# Altium PCB TB-01_V1.0.PcbDoc
Units mm, origin at the board's own origin, x right, y up, seen from the top; angles counter-clockwise.
Board outline 26.04 x 42.47 mm, 2 copper layers (Top Layer, Bottom Layer), stack 0.971 mm thick; 36 components, 38 nets, 148 pads, 86 vias.
Unrouted connection lines stored in the file: 1.
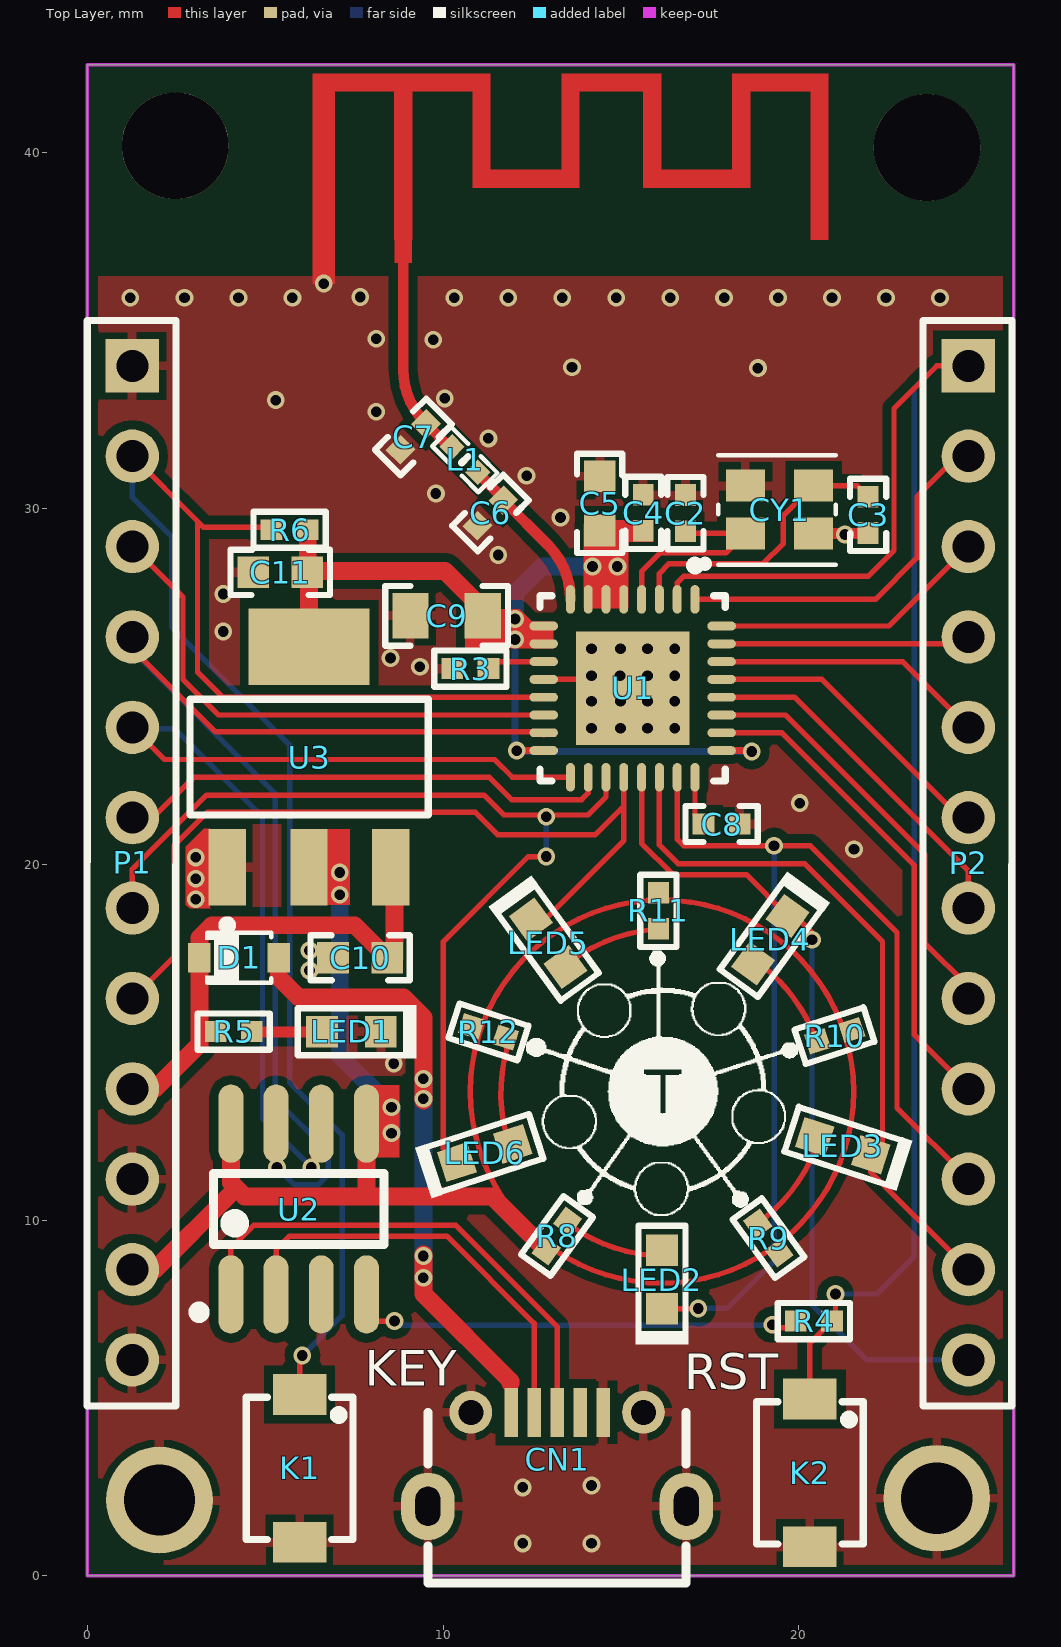
[diagram p0: Top Layer view]
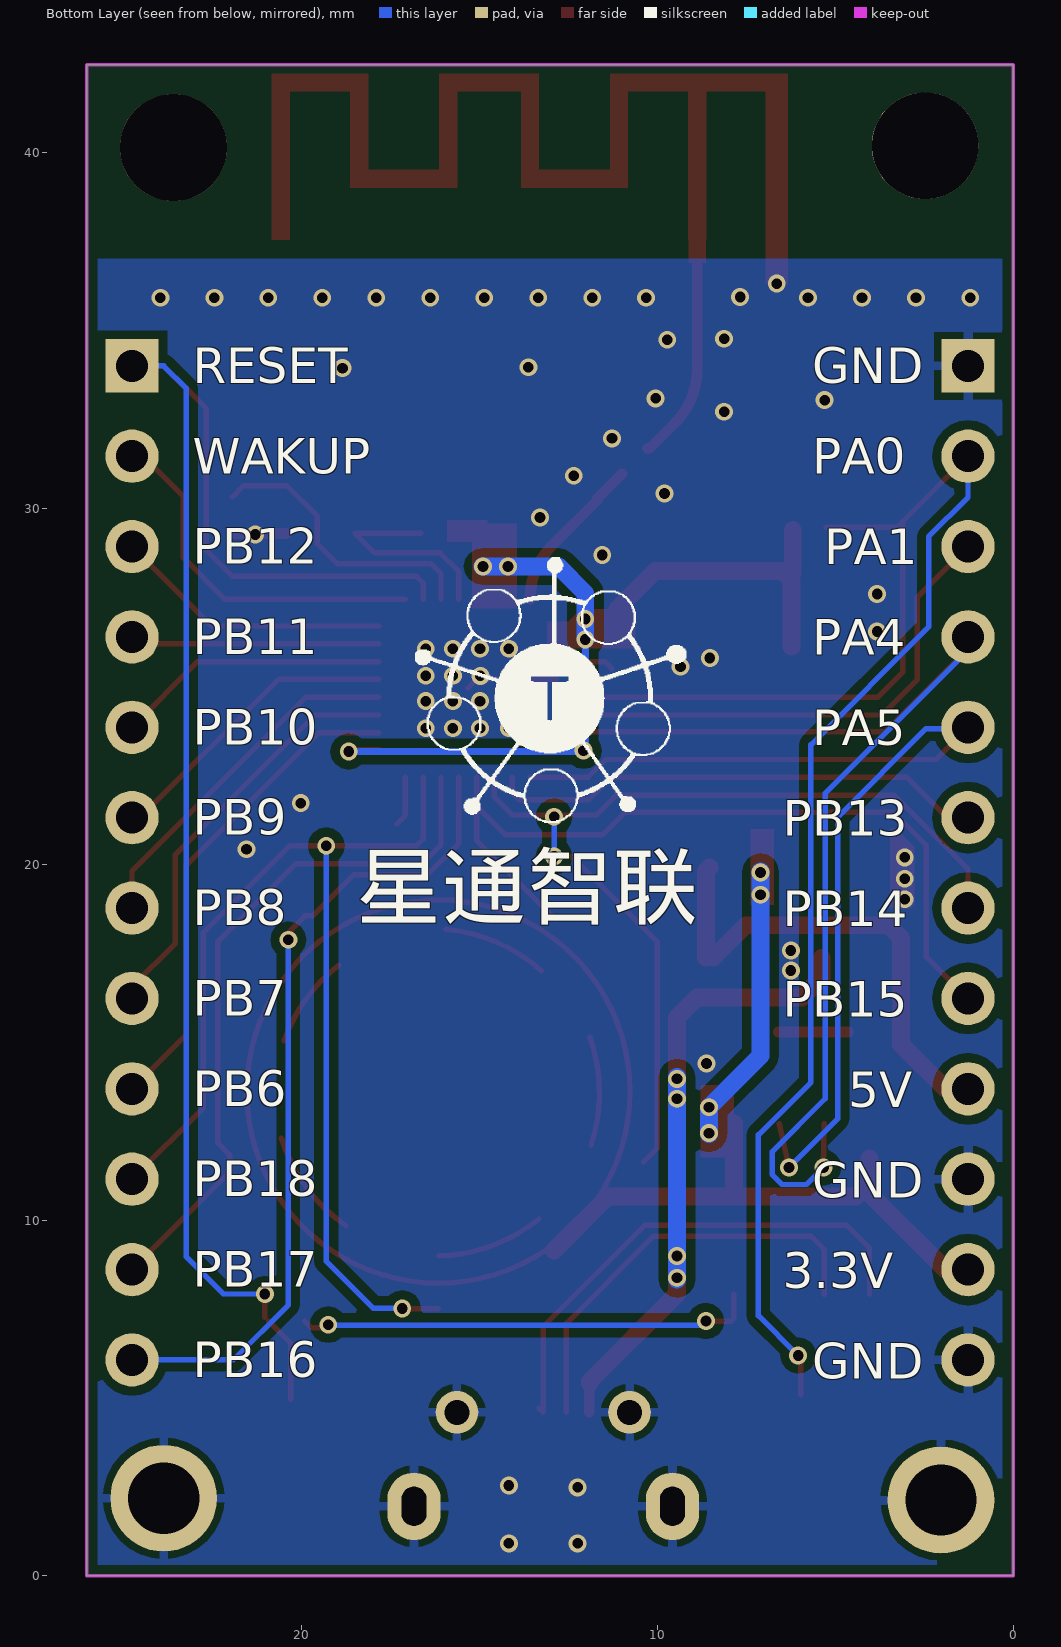
[diagram p1: Bottom Layer view, seen from below]
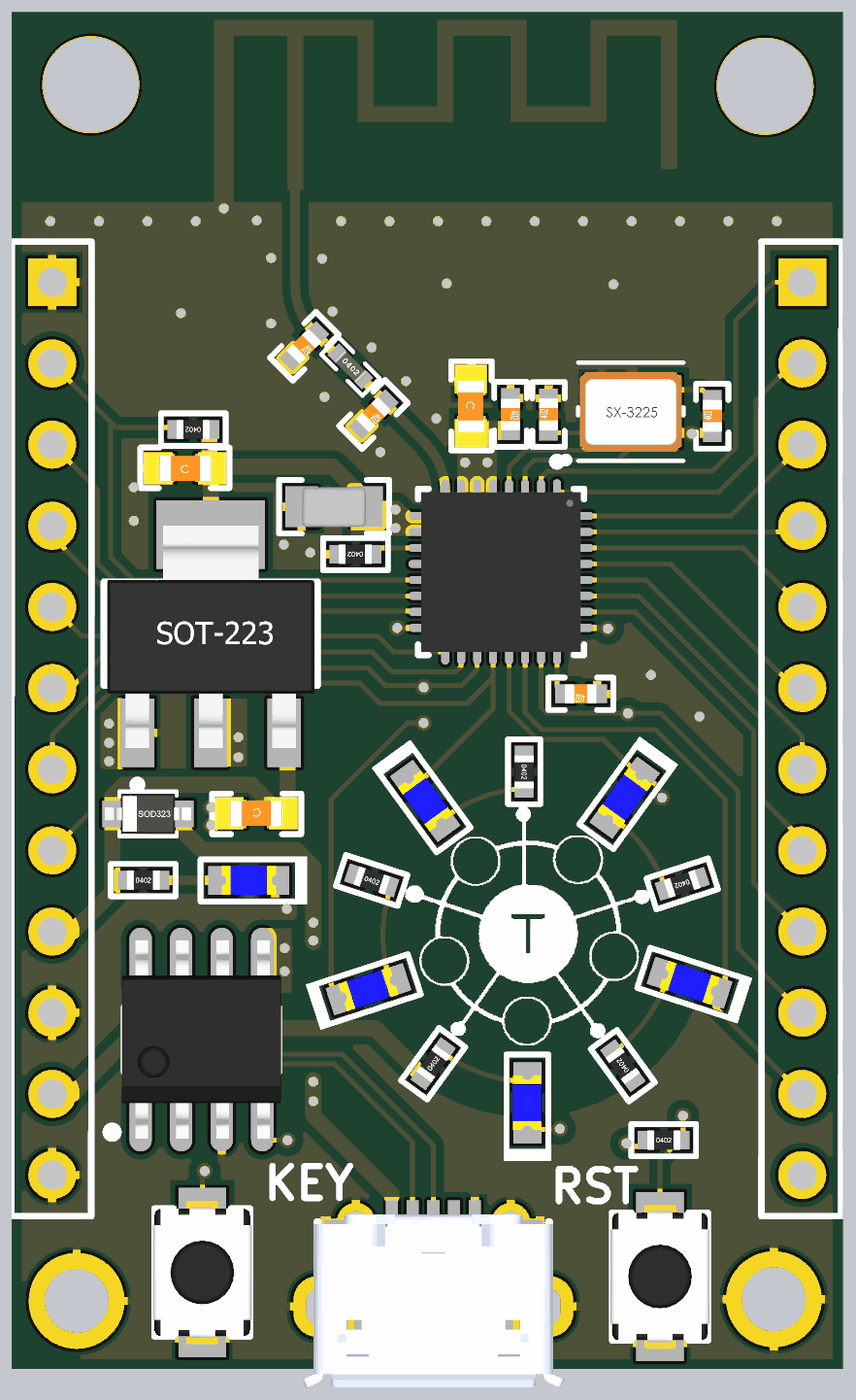
[diagram p2: 3D render of the assembled board from above, using the file's embedded part models]

## Layer stack, top to bottom
Top Solder: solder mask 0.0102, Solder Resist, Dk 3.5
Top Layer: signal copper 0.0356
Dielectric 1: dielectric 0.9, FR-4, Dk 4.8
Bottom Layer: signal copper 0.0356
Bottom Solder: solder mask 0.0102, Solder Resist, Dk 3.5

## Board outline
0,0 0,42.469 26.035,42.469 26.035,0

## Design rules (kind name [scope] priority, off if disabled: settings)
Clearance Clearance_1 [InPolygon] p1: gap=0.254 ignorepadtopadclearanceinfootprint=FALSE except(0: Arc-Hole Track-Hole SMDPad-Hole THPad-Hole Via-Hole Fill-Hole Poly-Hole Region-Hole Text-Hole)
Clearance [All] p2: gap=0.152 ignorepadtopadclearanceinfootprint=FALSE except(0: Arc-Hole Track-Hole SMDPad-Hole THPad-Hole Via-Hole Fill-Hole Poly-Hole Region-Hole Text-Hole)
HoleToHoleClearance [All] p1: gap=0 allowstackedmicrovias=TRUE
MinimumSolderMaskSliver [All] p1: minsoldermaskwidth=0
PolygonConnect PolygonConnect_2 [All vs InComponent('C6') Or InComponent('C7')] p1: connectstyle=Direct reliefconductorwidth=0.254 reliefentries=4 polygonreliefangle="90 Angle" airgapwidth=0.254
PolygonConnect PolygonConnect_1 [All vs InPadClass('ALL PADS')] p2: connectstyle=Relief reliefconductorwidth=0.254 reliefentries=4 polygonreliefangle="90 Angle" airgapwidth=0.2
PolygonConnect [All] p3: connectstyle=Direct reliefconductorwidth=0.254 reliefentries=4 polygonreliefangle="90 Angle" airgapwidth=0.2
RoutingVias [All] p1: holewidth=0.3 width=0.5 viastyle="Through Hole" minholewidth=0.2 minwidth=0.4 maxholewidth=0.5 maxwidth=1
SilkToSilkClearance [All] p1: silktosilkclearance=0
SilkToSolderMaskClearance [IsPad] p1: minsilkscreentomaskgap=0 clearancetoexposedcopper=TRUE
SolderMaskExpansion [All] p1: expansion=0.102
Width [All] p1: maxlimit=1.27 minlimit=0.152 preferedwidth=0.152
26 further rules are at their usual default settings.

## Components (designator, comment, footprint, x,y, rotation, side; value= is the part's Value field where it differs from the comment)
C2 "15PF" 0402C 16.815,30.378 r0 top
C3 "15PF" 0402C 21.946,30.328 r0 top
C4 "0.1uF" 0402C 15.625,29.371 r180 top
C5 "4.7uF" 0603C 14.4,30.146 r90 top
C6 "NC" 0402C 10.973,29.515 r135 top
C7 "NC" 0402C 8.807,31.652 r135 top
C8 "1uF" 0402C 17.323,21.133 r90 top
C9 "47uF" 0805C 10.1,26.985 r180 top
C10 "10uF" 0603C 7.671,17.374 r0 top
C11 "10uF" 0603C 5.425,28.204 r180 top
CN1 "USB_Type-MICRO" MICRO_USB_DIPB 13.208,3.277 r270 top
CY1 "40MHz" CY3225 19.456,29.972 r0 top
D1 "IN4148" 1n5819 4.267,17.374 r180 top
K1 "Button" BUTTON3*4*2 5.969,3.023 r270 top
K2 "Button" BUTTON3*4*2 20.309,2.896 r270 top
L1 "6.8PF" 0402L 10.613,31.375 r315 top
LED1 "Red" 0603LED 7.425,15.291 r270 top
LED2 "Red" 0603LED 16.154,8.331 r180 top
LED3 "Red" 0603LED 21.234,12.09 r252 top
LED4 "Red" 0603LED 19.202,17.882 r324 top
LED5 "Red" 0603LED 12.954,17.78 r36 top
LED6 "Red" 0603LED 11.176,11.887 r108 top
P1 "1*12pin 2.54" "1*12PIN 2.54" 1.27,20.041 r270 top
P2 "1*12pin 2.54" "1*12PIN 2.54" 24.765,20.041 r270 top
R3 "24K" 0402R#1 10.262,25.502 r90 top
R4 "0R" 0402R#1 20.93,7.163 r270 top
R5 "4.7K" 0402R#1 4.625,15.3 r270 top
R6 "10K" 0402R#1 5.182,29.402 r90 top
R8 "1K" 0402R#1 13.5,9.966 r324 top
R9 "1K" 0402R#1 18.847,9.906 r36 top
R10 "1K" 0402R#1 20.522,15.028 r108 top
R11 "1K" 0402R#2 16.053,18.694 r180 top
R12 "1K" 0402R#2 11.278,15.291 r252 top
U1 "W600" W600 15.331,24.947 r270 top
U2 "CH330N" CH330N 5.944,10.312 r0 top
U3 "AMS1117" AMS1117 6.234,23.014 r270 top

## Footprints (in the part's own frame and the unit in brackets; to place one, negate y for a bottom-side part, rotate by r counter-clockwise, add the part's x,y. Pads: shape width x height; smd on the part's side, far side on the other; paste and mask are expansions set on the pad)
"1*12PIN 2.54" [mm]
  rect 1.5x1.5 hole 0.9: 1(-13.97,0)
  round 1.5 hole 0.9: 2(-11.43,0) 3(-8.89,0) 4(-6.35,0) 5(-3.81,0) 6(-1.27,0) 7(1.27,0) 8(3.81,0) 9(6.35,0) 10(8.89,0) 11(11.43,0) 12(13.97,0)
  silkscreen extent -15.24,-1.28 15.26,1.23, body extent -15.18,-1.23 15.3,1.31, height 2.38
1n5819 [mm]
  rect 0.63x0.83 smd: 1(-1.115,0) 2(1.115,0)
  silkscreen extent -0.9,-0.7 0.96,0.7, body extent -1.35,-0.62 1.35,0.62, height 1.1
0402C [mil]
  rect 23x24 smd: 1(0,0) 2(0,-40)
  silkscreen extent -20,-60 20,20, body extent -12,-39 12,0, height 8
0402L [mil]
  rect 20x20 smd: 1(-20,0) 2(20,0)
  silkscreen extent -36,-15 36,15, body extent -20,-10 20,10, height 20
0402R#1 [mil]
  rect 23x24 smd: 1(0,0) 2(0,-40)
  silkscreen extent -20,-60 20,20, body extent -12,-40 12,1, height 13
0402R#2 [mil]
  rect 23x24 smd: 1(0,20) 2(0,-20)
  silkscreen extent -20,-40 20,40, body extent -12,-20 12,21, height 13
0603C [mil]
  rect 35x35 smd: 1(-30,0) 2(30,0)
  silkscreen extent -55,-25 55,25, body extent -52,-19 51,20, height 35
0603LED [mil]
  rect 35x35 smd: 1(0,-32.5) 2(0,32.5)
  silkscreen extent -29,-60 29,72, body extent -18,-33 18,33, height 35
0805C [mil]
  rect 40x50 smd: 1(40,0) 2(-40,0)
  silkscreen extent -68,-33 68,33, body extent -39,-24 39,25, height 31
AMS1117 [mm]
  rect 2.15x1.05 smd: 1(3.1,2.3) 2(3.1,0) 3(3.1,-2.3)
  rect 2.15x3.4 smd: 2(-3.1,0)
  silkscreen extent -1.62,-3.35 4.85,3.35, body extent -3.38,-3.25 3.58,3.25, height 1.7
BUTTON3*4*2 [mm]
  rect 1.143x1.5 smd: 1(-2.075,0) 2(2.075,0)
  round 0 all layers, no hole paste-2.54 mask-2.54: MH1(0,0.9) MH2(0,-0.9)
  silkscreen extent -2,-1.5 2,1.5, body extent -2.25,-1.55 2.25,1.55, height 2.05
CH330N [mm]
  oval 0.7x2.2 smd: 1(-1.905,-2.4) 2(-0.635,-2.4) 3(0.635,-2.4) 4(1.905,-2.4) 5(1.905,2.4) 6(0.635,2.4) 7(-0.635,2.4) 8(-1.905,2.4)
  silkscreen extent -2.95,-3.05 2.4,1, body extent -2.5,-3.1 2.5,3.1, height 1.75
CY3225 [mm]
  rect 1.1x0.899 smd: 1(-0.96,-0.673) 2(0.96,-0.673) 3(0.96,0.673) 4(-0.96,0.673)
  silkscreen extent -2.2,-1.62 1.59,1.52, body extent -1.66,-1.27 1.54,1.23, height 0.81
MICRO_USB_DIPB [mil]
  rect 54x15 smd: 1(-52,-51) 2(-52,-25.5) 3(-52,0) 4(-52,25.5) 5(-52,51)
  oval 74.8x59.06 hole 27.56 slot 43.31 at 0 deg: 6(52,143) 7(52,-143)
  round 47.24 hole 27.5: 8(-52,-95.5) 9(-52,95.5)
  silkscreen extent -52,-143 137,143, body extent -61,-161 152,161, height 105
W600 [mm]
  oval 0.8x0.25 smd: 1(-2.5,1.75) 2(-2.5,1.25) 3(-2.5,0.75) 4(-2.5,0.25) 5(-2.5,-0.25) 6(-2.5,-0.75) 7(-2.5,-1.25) 8(-2.5,-1.75) 17(2.5,-1.75) 18(2.5,-1.25) 19(2.5,-0.75) 20(2.5,-0.25) 21(2.5,0.25) 22(2.5,0.75) 23(2.5,1.25) 24(2.5,1.75)
  oval 0.25x0.8 smd: 9(-1.75,-2.5) 10(-1.25,-2.5) 11(-0.75,-2.5) 12(-0.25,-2.5) 13(0.25,-2.5) 14(0.75,-2.5) 15(1.25,-2.5) 16(1.75,-2.5) 25(1.75,2.5) 26(1.25,2.5) 27(0.75,2.5) 28(0.25,2.5) 29(-0.25,2.5) 30(-0.75,2.5) 31(-1.25,2.5) 32(-1.75,2.5)
  rect 3.2x3.2 smd paste-2.54: 33(0,0)
  silkscreen extent -3.57,-2.6 2.6,2.6, body extent -2.51,-2.51 2.51,2.51, height 0.8

## Part data
C2 C3 C4 C5 C6 C7 C8 C9 C10 C11: library part CAP
CY1: library part CY3225
L1: library part L
LED1 LED2 LED3 LED4 LED5 LED6: library part LED
R3 R4 R5 R6 R8 R9 R10 R11 R12: library part RES

## Free pads (board coordinates)
  round 3 hole 2: 2(2.032,2.134) 2(23.876,2.184)
  round 3 hole 3: 2(2.475,40.196) 2(23.6,40.146)

## Via types
v1: diameter 0.5, hole 0.3, Top Layer to Bottom Layer, tented both sides, 86 vias

## Nets (pads, with @x,y where several pads share a name; then routed paths per layer and width w, separated by ;. In a path a pad name is that pad's centre, name@x,y a point inside that pad or via, vN(x,y) a via of type N, cw(c..) or ccw(c..) an arc to the next point about the centre after c; other vN are vias at no path point)
5V: C10.2 D1.2 P1.9 R5.2 U3.1 | length 13.8
  Top Layer w0.5: P1.9 1.905,13.691 3.152,14.938 D1.2 3.152,17.935 3.505,18.288 7.518,18.288 C10.2 ; U3.1 8.636,19.812 C10.2@8.636,17.374
ANT: C6.2 L1.2 U1.8 | length 4.5
  Top Layer w0.305: L1.2@10.993,30.977 11.691,30.279 C6.2 12.947,28.978 cw(c11.416,27.447) U1.8
ANT1: C7.2 L1.1 | length 6
  Top Layer w0.305: 8.882,37.196 8.882,33.901 ccw(c10.991,33.901) 9.5,32.41 10.214,31.696 L1.1@10.275,31.696
GND: C2.1 C3.2 C4.2 C5.2 C6.1 C7.1 C8.2 C9.1 C10.1 C11.2 CN1.5 CN1.6 CN1.7 CN1.8 CN1.9 CY1.2 CY1.4 K1.2 K2.2 LED1.2 P1.1 P1.10 P1.12 pad.2@2.032,2.134 pad.2@23.876,2.184 R3.1 U1.12 U1.33 U2.3 U3.3 | length 4.1
  Top Layer w0.152: U1.12 15.081,25.197 U1.33
  Top Layer w0.305: CY1.2 C3.2@21.933,29.299
  other v1: 12.243,0.914 14.173,0.914 12.243,2.489 14.173,2.54 8.618,14.4 6.248,17.018 6.248,17.577 3.05,19.021 3.05,19.596 3.05,20.196 21.55,20.421 20.025,21.721 14.173,23.825 14.986,23.825 15.748,23.825 16.51,23.825 14.173,24.587 14.986,24.587 15.748,24.587 16.51,24.587 14.175,25.296 14.975,25.296 15.748,25.298 16.51,25.298 9.35,25.55 8.525,25.8 14.173,26.06 14.986,26.06 15.748,26.06 16.51,26.06 3.825,26.546 3.825,27.596 11.55,28.696 21.3,29.271 13.3,29.746 9.8,30.421 12.35,30.921 11.275,31.971 8.125,32.721 5.3,33.046 10.05,33.096 18.85,33.946 13.625,33.971 9.725,34.746 8.125,34.771 1.209,35.921 2.733,35.921 4.25,35.921 5.767,35.921 10.317,35.921 11.834,35.921 13.35,35.921 14.867,35.921 16.384,35.921 17.901,35.921 19.417,35.921 20.934,35.921 22.451,35.921 23.968,35.921 7.675,35.946 6.645,36.321
NetC8_1: C8.1 U1.24 | length 1.4
  Top Layer w0.152: U1.24 17.081,21.375 C8.1
NetCN1_2: CN1.2 U2.2 | length 12.2
  Top Layer w0.152: U2.2 5.309,9.169 5.69,9.55 10.109,9.55 12.56,7.099 CN1.2
NetCN1_3: CN1.3 U2.1 | length 14.5
  Top Layer w0.152: U2.1 4.039,9.22 4.674,9.855 10.363,9.855 13.208,7.01 CN1.3 CN1.3@13.322,4.712
NetLED1_1: LED1.1 R5.1 | length 2
  Top Layer w0.305: R5.1@4.625,15.291 LED1.1
NetLED2_1: LED2.1 R8.1 | length 3
  Top Layer w0.152: R8.1@13.334,10.029 ccw(c16.25,13.621) LED2.1@16.145,8.995
NetLED3_1: LED3.1 R9.1 | length 3.1
  Top Layer w0.152: R9.1@18.752,9.845 ccw(c16.15,13.671) LED3.1@20.571,12.308
NetLED4_1: LED4.1 R10.1 | length 2.7
  Top Layer w0.152: LED4.1@18.955,17.162 cw(c16.13,13.499) R10.1@20.492,15.04
NetLED5_1: LED5.1 R11.1 | length 3
  Top Layer w0.152: LED5.1@13.263,17.009 cw(c16.35,13.564) R11.1@15.952,18.173
NetLED6_1: LED6.1 R12.1 | length 3.1
  Top Layer w0.152: LED6.1@11.866,12.106 cw(c16.252,13.577) R12.1@11.9,15.146
NetR3_2: R3.2 U1.11 | length 1.6
  Top Layer w0.152: R3.2 11.473,25.697 U1.11
PA0: K1.1 P1.2 R6.1 U1.13 | length 48.3
  Top Layer w0.152: P1.2 3.099,29.642 ; R6.1@5.25,29.471 3.27,29.471 3.099,29.642 ; K1.1 v1@5.969,6.121 ; U1.13 3.802,24.697 3.099,25.4 3.099,29.642
  Bottom Layer w0.152: P1.2 1.27,30.315 2.375,29.21 2.375,26.67 5.69,23.355 5.69,13.868 7.163,12.395 7.163,7.315 v1(6.045,6.198)
PA1: P1.3 U1.14 | length 14.9
  Top Layer w0.152: P1.3 2.692,27.508 2.692,25.197 3.692,24.197 U1.14
PA4: P1.4 U1.15 U2.7 | length 33.2
  Top Layer w0.152: P1.4@1.105,26.226 3.61,23.721 12.756,23.721 U1.15@12.831,23.646 ; U2.7 v1(5.334,11.481)
  Bottom Layer w0.152: P1.4 1.27,26.01 5.283,21.996 5.283,13.411 6.778,11.917 6.778,11.283 6.497,11.002 5.813,11.002 v1(5.334,11.481)
PA5: P1.5 U1.17 U2.6 | length 29.3
  Top Layer w0.152: P1.5 2.175,22.946 11.45,22.946 11.949,22.447 U1.17 ; v1(6.299,11.481) U2.6
  Bottom Layer w0.152: P1.5@1.232,23.812 2.451,23.812 4.928,21.336 4.928,12.852 v1(6.299,11.481)
PB6: P2.9 U1.26 | length 14
  Top Layer w0.152: U1.26 19.524,23.697 23.241,19.98 23.241,15.215 P2.9 P2.9@24.765,13.818
PB7: P2.8 U1.27 | length 11.9
  Top Layer w0.152: U1.27 19.624,24.197 23.546,20.275 23.546,17.781 24.765,16.562 P2.8
PB8: P2.7 U1.28 | length 10
  Top Layer w0.152: U1.28 19.874,24.697 24.765,19.806 P2.7
PB9: P2.6 U1.29 | length 8.5
  Top Layer w0.152: U1.29 20.649,25.197 24.535,21.311 P2.6
PB10: P2.5 U1.30 | length 7.7
  Top Layer w0.152: U1.30 22.919,25.697 P2.5
PB11: P2.4 U1.31 | length 7
  Top Layer w0.152: U1.31 24.571,26.197 P2.4
PB12: P2.3 U1.32 | length 7.9
  Top Layer w0.152: U1.32 22.531,26.697 P2.3
PB13: P1.6 U1.18 | length 14.1
  Top Layer w0.152: P1.6 1.854,21.311 2.989,22.446 11.3,22.446 11.927,21.818 13.893,21.818 14.081,22.006 U1.18
PB14: LED6.2 P1.7 U1.19 | length 28.1
  Top Layer w0.152: P1.7 1.27,19.863 3.353,21.946 11.15,21.946 11.709,21.387 14.072,21.387 14.581,21.896 U1.19 ; LED6.2@10.058,11.965 LED6.2 10.008,12.015 10.008,17.831 12.395,20.218 v1(12.903,20.218)
  Bottom Layer w0.152: v1(12.903,20.218) v1(12.903,21.336)
PB15: LED5.2 P1.8 U1.20 | length 23.3
  Top Layer w0.152: P1.8 2.438,17.399 2.438,20.523 3.384,21.469 10.902,21.469 11.543,20.828 14.268,20.828 15.081,21.641 ; LED5.2@12.86,18.448 15.081,20.669 15.081,21.641 ; U1.20 15.081,21.641
PB16: LED4.2 P2.12 U1.21 | length 23.2
  Top Layer w0.152: U1.21 15.581,20.589 16.434,19.736 16.46,19.736 16.485,19.71 18.527,19.71 LED4.2 19.906,18.549 20.371,18.085 v1(20.371,17.882)
  Bottom Layer w0.152: v1(20.371,17.882) 20.371,7.62 21.92,6.071 P2.12
PB17: LED3.2 P2.11 U1.22 | length 20.2
  Top Layer w0.152: U1.22 16.081,20.546 16.612,20.015 20.168,20.015 22.352,17.831 22.352,12.168 LED3.2 22.019,11.356 P2.11 P2.11@24.765,9.068
PB18: LED2.2 P2.10 U1.23 | length 32.1
  Top Layer w0.152: LED2.2 v1@17.158,7.506 ; U1.23 16.581,20.706 16.764,20.523 v1(19.304,20.523) 20.32,20.523 22.758,18.085 22.758,13.157 P2.10
  Bottom Layer w0.152: v1(17.17,7.518) 17.983,7.518 19.304,8.839 v1(19.304,20.523)
RESET: K2.1 P2.1 R4.1 U1.2 | length 45.5
  Top Layer w0.152: U1.2 16.581,27.909 16.764,28.092 21.946,28.092 22.675,28.822 22.675,32.81 23.876,34.011 P2.1 ; K2.1 20.309,6.542 R4.1 ; R4.1@21.031,7.264 v1(21.031,7.925)
  Bottom Layer w0.152: v1@20.98,7.925 v1(21.031,7.925) 22.2,7.925 23.241,8.966 23.241,33.376 23.876,34.011 P2.1
RTS: R4.2 U2.4 | length 12.9
  Top Layer w0.152: U2.4 7.849,7.239 7.925,7.163 v1(8.636,7.163) ; v1(19.253,7.061) 19.344,6.971 19.721,6.971 R4.2
  Bottom Layer w0.152: v1(8.636,7.163) 8.759,7.04 v1@19.253,7.04
V5V: CN1.1 D1.1 | length 18.6
  Top Layer w0.3: 11.9,5.414 11.913,5.402 CN1.1
  Top Layer w0.5: D1.1 5.382,16.817 5.944,16.256 8.89,16.256 9.449,15.697 v1(9.449,13.97) v1(9.449,13.411) v1@9.449,13.36 ; v1@9.449,9.042 v1(9.449,8.992) v1(9.449,8.382) 9.449,7.925 11.9,5.474 11.9,5.414
  Bottom Layer w0.5: v1@9.449,8.331 v1(9.449,8.382) v1(9.449,8.992) v1(9.449,13.411) v1(9.449,13.97) v1@9.449,14.021
VCC: C4.1 C5.1 C9.2 C11.1 P1.11 R6.2 R8.2 R9.2 R10.2 R11.2 R12.2 U1.5 U1.6 U1.7 U1.9 U1.10 U1.16 U1.25 U2.5 U2.8 U3.2 | length 82.5
  Top Layer w0.152: 21.539,13.614 ccw(c16.154,13.614) 21.539,13.614
  Top Layer w0.2: v1@12.076,23.197 U1.16 ; U1.25 v1@18.649,23.197
  Top Layer w0.5: P1.11 1.905,8.611 4.064,10.77 ; U2.8@4.039,11.735 4.039,11.049 4.42,10.668 11.379,10.668 R8.2 ; C11.1@6.198,28.194 R6.2 ; U3.2@6.234,26.114 6.234,27.98 6.499,28.245 10.058,28.245 11.125,27.178 C9.2@11.125,26.67 ; 7.849,10.77 U2.5
  Bottom Layer w0.2: v1@12.025,23.246 v1(12.025,26.321) ; v1@12.1,23.171 v1(18.675,23.171)
  Bottom Layer w0.5: v1@7.1,19.796 v1(7.1,19.771) v1(7.1,19.146) 7.1,14.621 v1(8.55,13.171) v1@8.55,12.421 ; v1(12.025,26.321) v1(12.025,26.896) 12.025,27.621 12.775,28.371 v1@14.925,28.371
  other v1: 8.55,12.446 12.075,23.196 14.2,28.371 14.9,28.371
WAKUP: P2.2 U1.1 | length 10.4
  Top Layer w0.152: U1.1 22.151,27.447 23.325,28.621 23.325,30.335 24.46,31.471 P2.2
XIN: C2.2 CY1.1 U1.4 | length 6
  Top Layer w0.152: U1.4 15.581,28.23 16.104,28.753 17.95,28.753 CY1.1 C2.2@16.65,29.299
XOUT: C3.1 CY1.3 U1.3 | length 8.2
  Top Layer w0.152: U1.3 16.081,28.171 16.358,28.448 18.999,28.448 19.558,29.007 19.558,29.786 CY1.3 21.628,30.645 C3.1
pads on no net: CN1.4 K1.MH1 K1.MH2 K2.MH1 K2.MH2

## Polygon pours and split planes (outlines as drawn)
GND on Top Layer "TOP Layer-GND" (solid, remove dead copper, pour order 0): 0,36.521 26.01,36.521 26.035,36.546 26.025,36.536 26.025,0 0,0
GND on Bottom Layer "BOTTOM Layer-GND" (solid, remove dead copper, pour order 2): 0,37.021 26.035,37.021 26.035,0 0,0

## Keep-outs
Keep-Out Layer:
  the board outline again, w0.1

## Other copper
Top Layer:
  rectangle net ANT1: 8.632,36.896 9.132,37.625
  region net GND: 3.45,20.996 3.275,20.996 2.775,20.496 2.775,18.871 2.875,18.771 3.475,18.771 3.45,18.796
  region net VCC: 7.85,13.796 8.775,13.796 8.775,11.771 7.849,11.771
  region net VCC: 6.725,20.983 7.375,20.983 7.375,18.858 6.725,18.858
  region net VCC: 13.95,29.571 15.2,29.571 15.2,27.196 13.95,27.196
  region net VCC: 10.625,26.071 11.9,26.071 13.1,26.071 13.1,26.821 12.506,26.821 12.156,27.171 10.625,27.171
  pour cut-out: 13.306,22.921 17.37,22.921 17.37,27.036 13.306,27.036
  region net GND: 6.332,41.974 6.332,36.321 6.959,36.321 6.959,41.974
  region net ANT1: 6.332,41.722 6.332,42.222 11.332,42.222 11.332,39.522 13.332,39.522 13.332,42.222 16.132,42.222 16.132,39.522 18.132,39.522 18.132,42.222 20.832,42.222 20.832,37.548 20.332,37.548 20.332,41.722 18.632,41.722 18.632,39.022 15.632,39.022 15.632,41.722 13.832,41.722 13.832,39.022 10.832,39.022 10.832,41.722 9.132,41.722 9.132,37.548 8.632,37.548 8.632,41.722
  region net VCC: 14.775,29.671 15.9,29.671 15.9,29.071 14.775,29.071

## Silkscreen, mask and mechanical layers (free items; w line width, h text height)
Top Overlay:
  drawing of 1268 lines, arcs and shapes, not listed
  text "KEY" at 7.8,5.346 h1
  text "RST" at 16.775,5.246 h1
Bottom Overlay:
  drawing of 1268 lines, arcs and shapes, not listed
  text "GND" at 5.642,33.521 h1
  text "RESET" at 23.063,33.521 h1
  text "PA0" at 5.642,30.977 h1
  text "WAKUP" at 23.063,30.981 h1
  text "PB12" at 23.063,28.442 h1
  text "PA1" at 5.309,28.434 h1
  text "PB11" at 23.063,25.903 h1
  text "PA4" at 5.642,25.891 h1
  text "PB10" at 23.063,23.363 h1
  text "PA5" at 5.642,23.348 h1
  text "PB9" at 23.063,20.824 h1
  text "PB13" at 6.475,20.805 h1
  text "PB8" at 23.063,18.285 h1
  text "PB14" at 6.475,18.262 h1
  text "星通智联" at 18.466,17.941 h3
  text "PB7" at 23.063,15.745 h1
  text "PB15" at 6.475,15.718 h1
  text "PB6" at 23.063,13.206 h1
  text "5V" at 4.642,13.175 h1
  text "PB18" at 23.063,10.667 h1
  text "GND" at 5.642,10.632 h1
  text "PB17" at 23.063,8.127 h1
  text "3.3V" at 6.475,8.089 h1
  text "PB16" at 23.063,5.588 h1
  text "GND" at 5.642,5.546 h1
Top Paste:
  rectangle: 10.725,1.125 11.868,2.319
  rectangle: 12.625,1.131 13.768,2.325
  rectangle: 14.575,1.156 15.718,2.35
  region: 16.637,2.955 15.9,2.955 15.9,1.05 16.637,1.05
  rectangle: 9.788,1 10.525,2.905
  rectangle: 9.779,3.785 10.719,4.674
  region: 16.637,4.674 15.697,4.674 15.697,3.785 16.637,3.785
Top Solder:
  rectangle: 9.55,0.965 16.815,3.048
  rectangle: 10.49,0.076 15.875,3.124
  rectangle: 9.677,3.734 10.77,4.775
  region: 16.688,4.775 15.596,4.775 15.596,3.734 16.688,3.734